# Altium PCB PCB.PcbDoc
Units mm, origin at the board's own origin, x right, y up, seen from the top; angles counter-clockwise.
Board outline 119 x 68 mm, 2 copper layers (Top Layer, Bottom Layer); 74 components, 65 nets, 213 pads, 2 vias.
Unrouted connection lines stored in the file: 1.
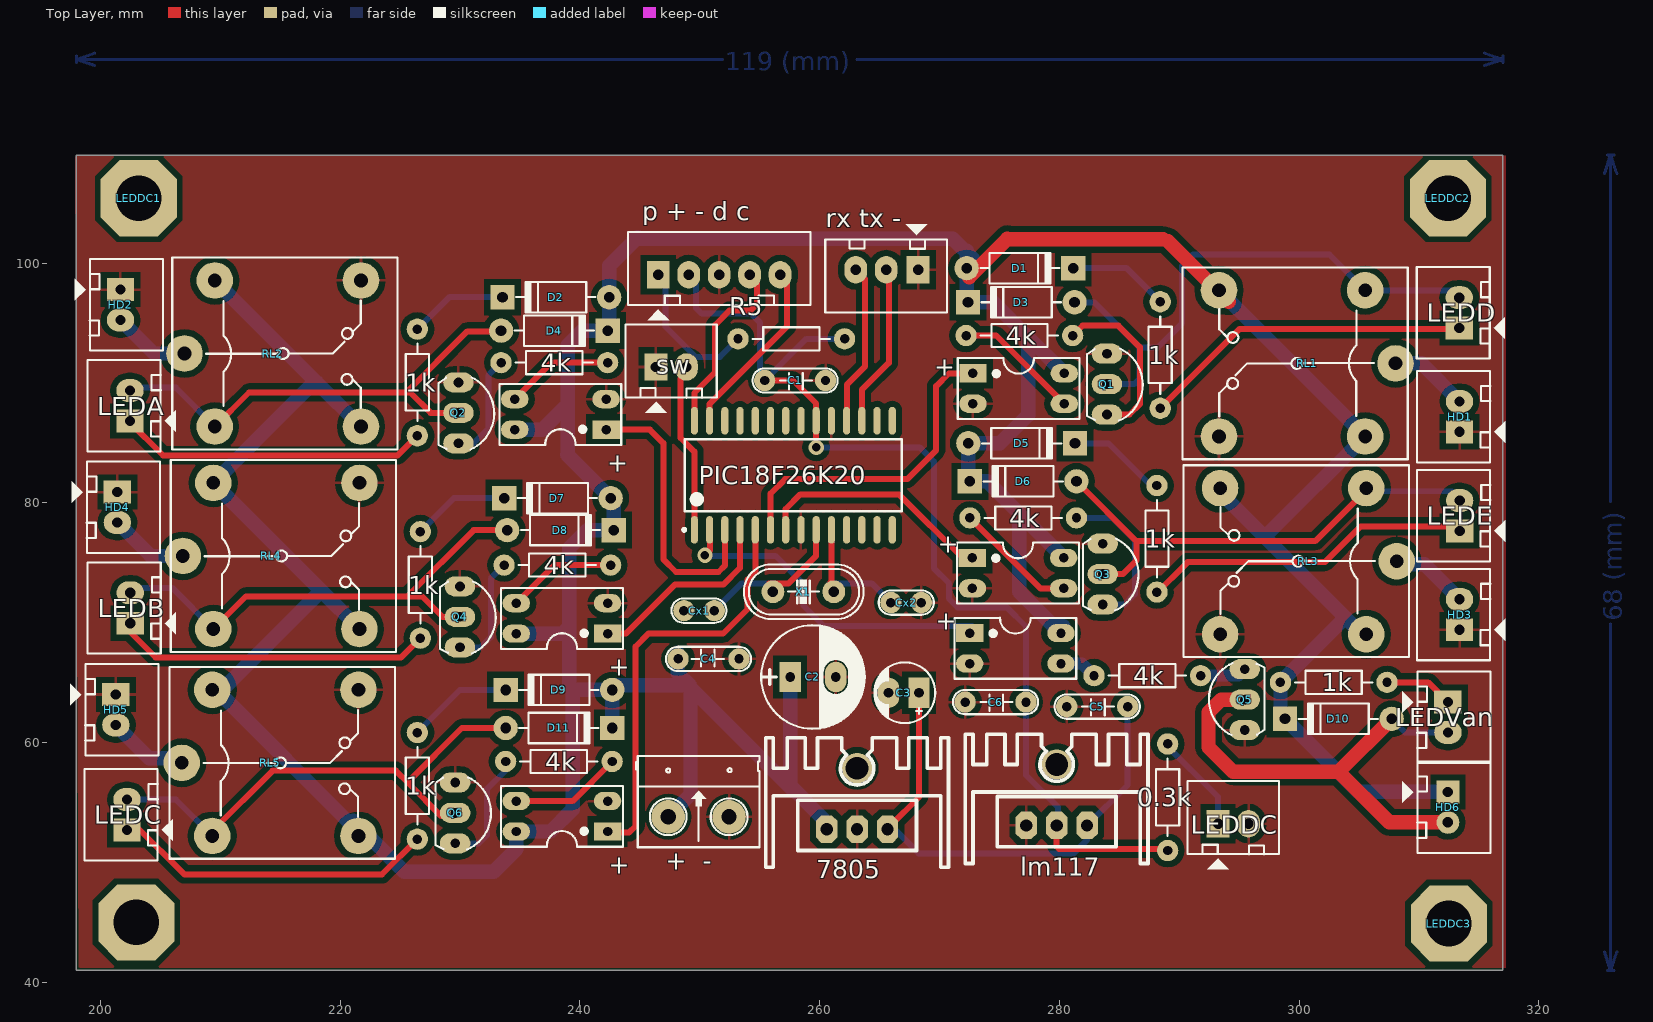
[diagram p0: Top Layer view]
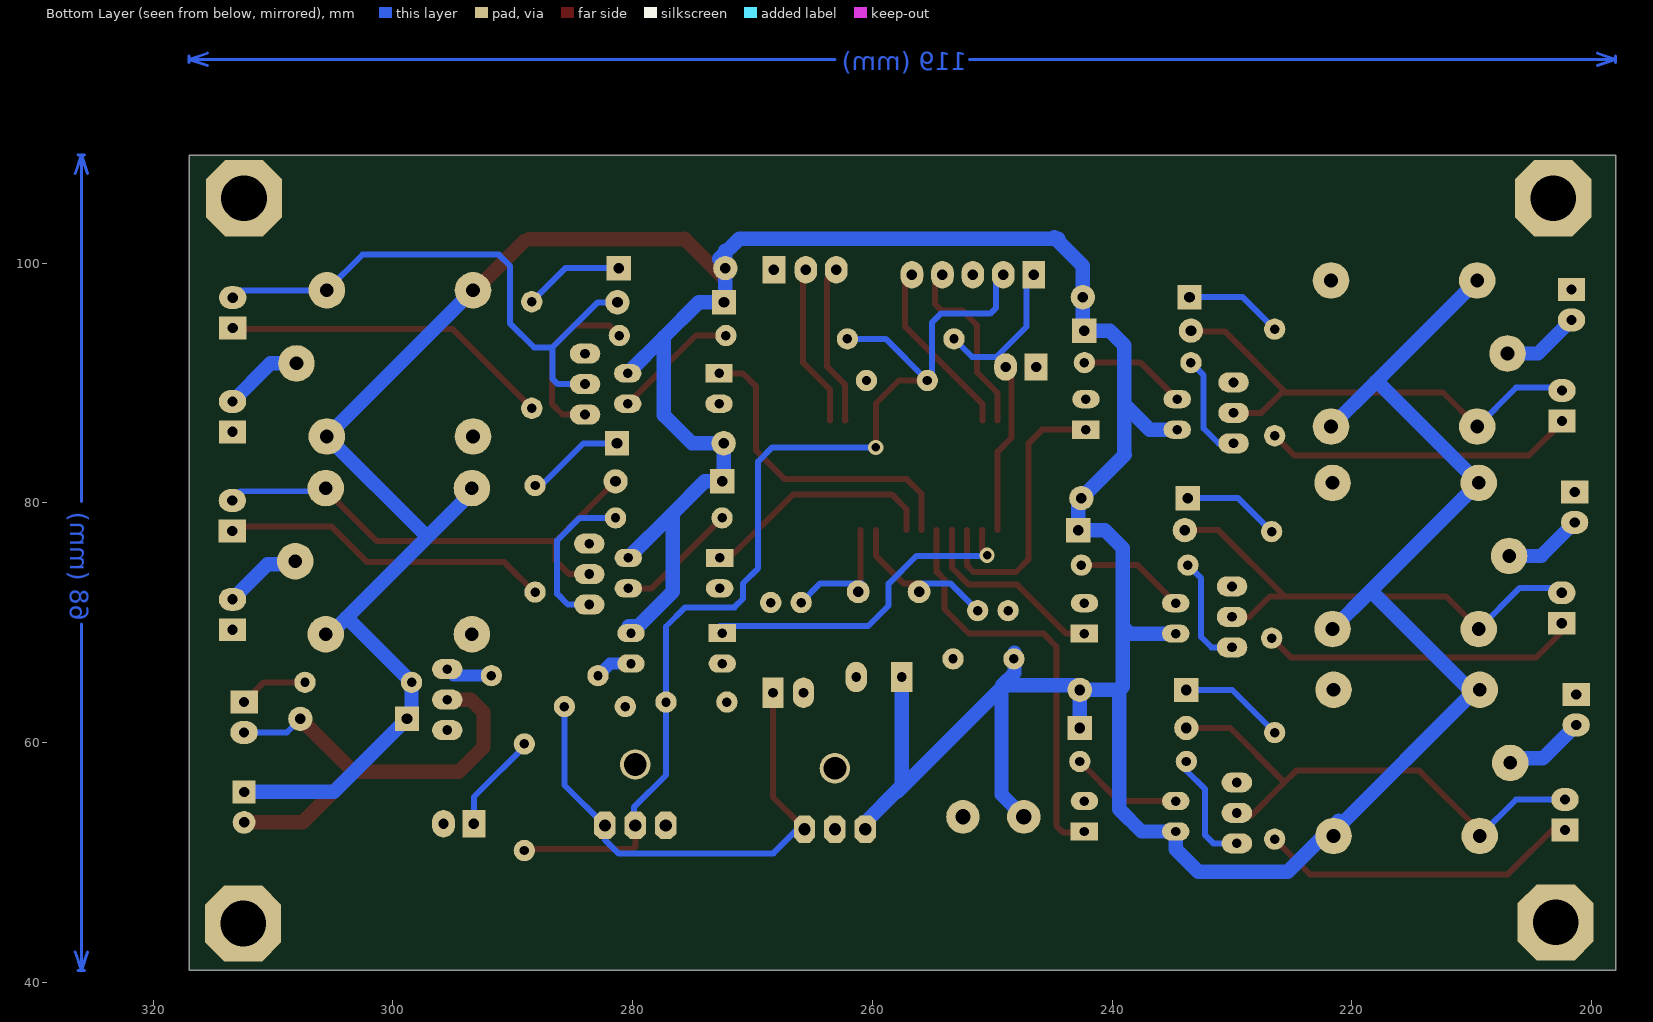
[diagram p1: Bottom Layer view, seen from below]
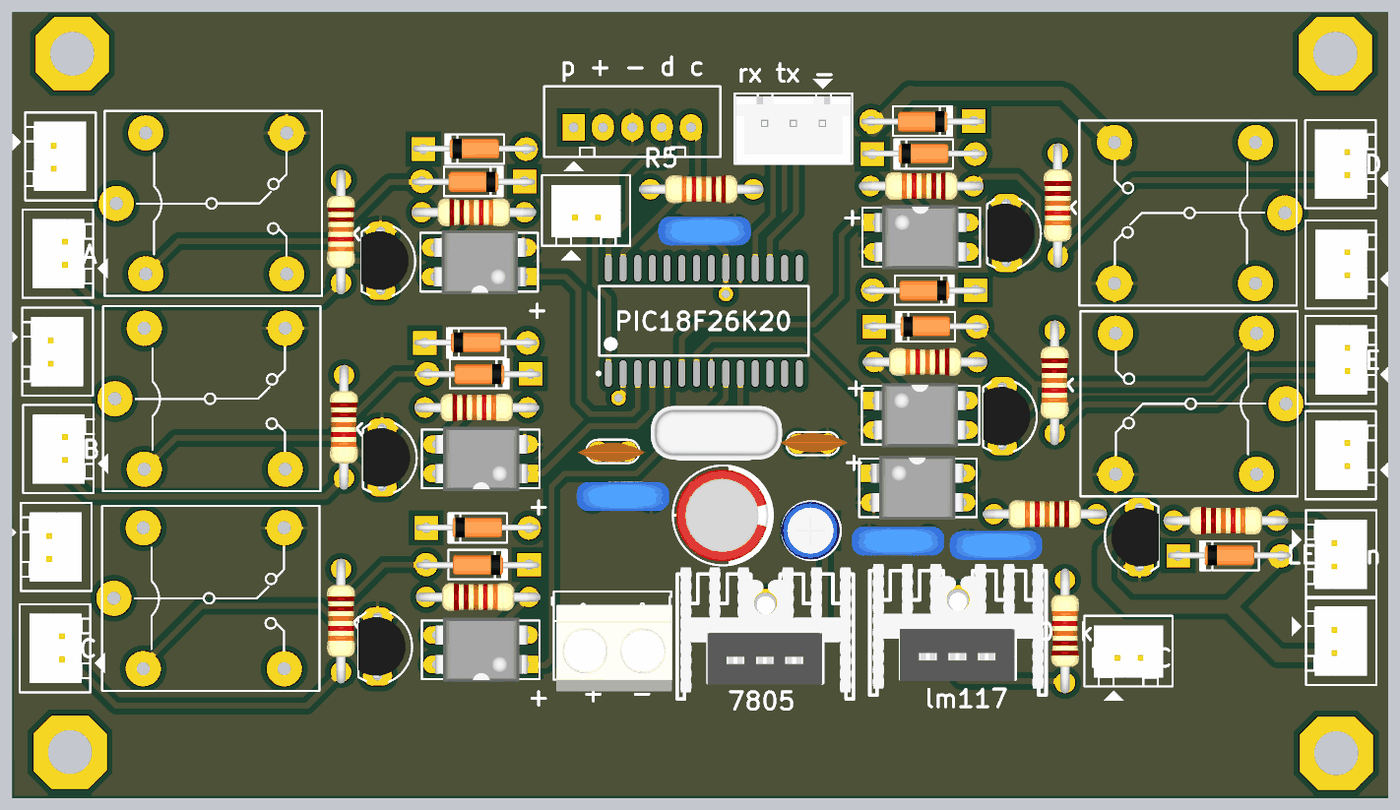
[diagram p2: 3D render of the assembled board from above, using the file's embedded part models]

## Layer stack, top to bottom
Top Layer: signal copper 0.0356
Dielectric: dielectric 0.32, FR-4, Dk 4.8
Bottom Layer: signal copper 0.0356

## Board outline
198,109 198,41 317,41 317,109 198,109

## Design rules (kind name [scope] priority, off if disabled: settings)
Clearance [All] p1: gap=0.5
PolygonConnect [All] p1: connectstyle=Relief reliefconductorwidth=0.254 reliefentries=4 polygonreliefangle="90 Angle"
RoutingVias [All] p1: holewidth=0.711 width=1.27 viastyle="Through Hole" minholewidth=0.711 minwidth=1.27 maxholewidth=0.711 maxwidth=1.27
SilkscreenOverComponentPads [All] p1: minsilkscreentomaskgap=0.254
SolderMaskExpansion [All] p1: expansion=0.102
Width 220V [(InNet('24') OR InNet('25') OR InNet('26') OR InNet('27') OR InNet('28') OR InNet('29') OR InNet('30') OR InNet('31') OR InNet('32'))] p1: maxlimit=2.388 minlimit=2.388 preferedwidth=2.388
Width power [(InNet('12V') OR InNet('NetHD1_2') OR InNet('NetHD2_2') OR InNet('NetHD3_2') OR InNet('NetHD4_2') OR InNet('NetHD5_2') OR InNet('33') OR InNet('34'))] p2: maxlimit=1.2 minlimit=1.2 preferedwidth=1.2
Width "all net" [All] p3: maxlimit=1.5 minlimit=0.5 preferedwidth=0.5
27 further rules are at their usual default settings.

## Components (designator, comment, footprint, x,y, rotation, side; value= is the part's Value field where it differs from the comment)
0.3k "1k" R1/4W 289.04,59.881 r270 top (schematic designator R14)
1k "1k" R1/4W 226.441,51.943 r90 top (schematic designator R13)
1k "1k" R1/4W 307.34,65.024 r180 top (schematic designator R12)
1k "1k" R1/4W 226.695,68.707 r90 top (schematic designator R9)
1k "1k" R1/4W 288.146,72.554 r90 top (schematic designator R8)
1k "1k" R1/4W 226.441,85.598 r90 top (schematic designator R4)
1k "1k" R1/4W 288.417,87.884 r90 top (schematic designator R3)
4k "4.7k" R1/4W 242.697,58.42 r180 top (schematic designator R11)
4k "4.7k" R1/4W 282.896,65.579 r0 top (schematic designator R10)
4k "4.7k" R1/4W 242.57,74.803 r180 top (schematic designator R7)
4k "4.7k" R1/4W 272.542,78.74 r0 top (schematic designator R6)
4k "4.7k" R1/4W 242.316,91.694 r180 top (schematic designator R2)
4k "4.7k" R1/4W 272.221,93.954 r0 top (schematic designator R1)
7805 "7805" QTO-220H3 260.592,52.769 r0 top (schematic designator J2)
+ "PC817" DIP4/W0.3 242.316,52.578 r90 top (schematic designator U7)
+ "PC817" DIP4/W0.3 272.521,69.129 r270 top (schematic designator U6)
+ "PC817" DIP4/W0.3 242.316,69.088 r90 top (schematic designator U5)
+ "PC817" DIP4/W0.3 272.746,75.404 r270 top (schematic designator U4)
+ "PC817" DIP4/W0.3 242.189,86.106 r90 top (schematic designator U2)
+ "PC817" DIP4/W0.3 272.796,90.804 r270 top (schematic designator U1)
"+  -" "Jac DC" HED2 247.371,53.804 r0 top (schematic designator JDC1)
C1 "104" CN2 260.496,90.204 r180 top
C2 "100uF/35V" CP1.5/3.4 257.544,65.469 r0 top
C3 "10uF" CP1/2 268.296,64.154 r180 top
C4 "104" CN2 248.196,66.979 r0 top
C5 "104" CN2 285.696,63.004 r180 top
C6 "104" CN2 277.221,63.379 r180 top
Cx1 "33pF" CN1 251.221,71.004 r180 top
Cx2 "33pF" CN1 265.946,71.679 r0 top
D1 "1N4007" D1A 272.271,99.579 r180 top
D2 "1N4007" D1A 242.443,97.155 r0 top
D3 "1N4007" D1A 281.271,96.729 r0 top
D4 "1N4007" D1A 233.426,94.361 r180 top
D5 "1N4007" D1A 272.415,84.963 r180 top
D6 "1N4007" D1A 281.432,81.788 r0 top
D7 "1N4007" D1A 242.57,80.391 r0 top
D8 "1N4007" D1A 233.934,77.724 r180 top
D9 "1N4007" D1A 242.697,64.389 r0 top
D10 "1N4007" D1A 307.721,61.976 r0 top
D11 "1N4007" D1A 233.807,61.214 r180 top
HD1 "Header 2" CON2#1 313.388,85.917 r90 top
HD2 "Header 2" CON2#1 201.676,97.79 r270 top
HD3 "Header 2" CON2#1 313.388,69.407 r90 top
HD4 "Header 2" CON2#1 201.422,80.899 r270 top
HD5 "Header 2" CON2#1 201.295,64.008 r270 top
HD6 "Header 2" CON2#2 312.42,55.88 r270 top
LEDA "LED" CON2#1 202.471,86.829 r90 top (schematic designator LED2)
LEDB "LED" CON2#1 202.496,69.954 r90 top (schematic designator LED4)
LEDC "LED" CON2#1 202.221,52.704 r90 top (schematic designator LED6)
LEDD "LED" CON2#1 313.371,94.579 r90 top (schematic designator LED1)
LEDDC "LED" CON2#1 293.246,53.229 r0 top (schematic designator LED7)
LEDDC1 "LED" VIT 203.2,105.41 r0 top (schematic designator LED7)
LEDDC2 "LED" VIT 312.42,105.41 r0 top (schematic designator LED7)
LEDDC3 "LED" VIT 312.5,44.9 r0 top (schematic designator LED7)
LEDE "LED" CON2#1 313.396,77.654 r90 top (schematic designator LED3)
LEDVan "LED" CON2#1 312.421,63.379 r270 top (schematic designator LED5)
lm117 "LM117" QTO-220H3 277.241,53.086 r0 top (schematic designator J3)
"p + - d c" "ICSD" CON5 246.546,99.029 r0 top (schematic designator *1)
PIC18F26K20 "PIC18F26K20-I/SO" SOIC-SO28_N 257.81,82.296 r90 top (schematic designator U3)
Q1 "C1815" QTO-92 283.971,89.904 r270 top
Q2 "C1815" QTO-92 229.87,87.503 r270 top
Q3 "C1815" QTO-92 283.621,74.054 r270 top
Q4 "C1815" QTO-92 229.997,70.485 r270 top
Q5 "C1815" QTO-92 295.471,63.579 r90 top
Q6 "C1815" QTO-92 229.596,54.129 r270 top
R5 "1k" R1/4W 253.196,93.679 r0 top
RL1 "Relay 10A/12V" RL_SPDT_10A 308.054,91.632 r180 top
RL2 "Relay 10A/12V" RL_SPDT_10A 207.01,92.456 r0 top
RL3 "Relay 10A/12V" RL_SPDT_10A 308.146,75.129 r180 top
RL4 "Relay 10A/12V" RL_SPDT_10A 206.883,75.565 r0 top
RL5 "Relay 10A/12V" RL_SPDT_10A 206.796,58.304 r0 top
"rx tx -" "UART" CON3 268.097,99.441 r180 top (schematic designator J1)
sw "SW" CON2#1 246.346,91.329 r0 top (schematic designator SW1)
X1 "4Mhz" XT2 258.646,72.581 r180 top

## Footprints (in the part's own frame and the unit in brackets; to place one, negate y for a bottom-side part, rotate by r counter-clockwise, add the part's x,y. Pads: shape width x height; smd on the part's side, far side on the other; paste and mask are expansions set on the pad)
CN1 [mil]
  round 70 hole 31: 1(0,0) 2(100,0)
  silkscreen extent -40,-40 141,40, body extent -60,-30 170,37, height 265
CN2 [mil]
  round 70 hole 31: 1(0,0) 2(200,0)
  silkscreen extent -40,-40 240,40, body extent -54,-44 260,55, height 407
CON2#1 [mil] "CON2"
  rect 75x90 hole 34: 1(0,0)
  oval 75x90 hole 34: 2(100,0)
  silkscreen extent -100,-150 200,140, body extent -68,-70 168,107, height 236
CON2#2 [mil] "CON2"
  rect 75x75 hole 34: 1(0,0)
  round 75 hole 34: 2(100,0)
  silkscreen extent -100,-150 200,140, body extent -68,-70 168,107, height 236
CON3 [mil] "CON 3"
  rect 75x90 hole 34: 1(-5,0)
  oval 75x90 hole 34: 2(100,0) 3(200,0)
  silkscreen extent -100,-150 300,140, body extent -95,-90 295,136, height 276
CON5 [mil] "CON5"
  rect 75x90 hole 34: 1(0,0)
  oval 75x90 hole 34: 2(100,0) 3(200,0) 4(300,0) 5(400,0)
  silkscreen extent -100,-150 500,140
CP1.5/3.4 [mil] "Tu hoa 220->470uF,16V, 470uF/16V,25V"
  rect 70x100 hole 32: 1(0,0)
  oval 70x100 hole 32: 2(150,0)
  silkscreen extent -95,-170 245,170, body extent -85,-157 230,157, height 446
CP1/2 [mil] "Tu hoa < 22uF/16>50V"
  rect 70x100 hole 32: 1(0,0)
  oval 70x100 hole 32: 2(100,0)
  silkscreen extent -53,-100 147,100, body extent -49,-99 149,99, height 287
D1A [mil] "Diode 1A, W 100mil, L 350mil"
  round 80 hole 35: 1(0,0)
  rect 80x80 hole 35: 2(-350,0)
  silkscreen extent -305,-50 -45,50, body extent -386,-33 34,36, height 84
DIP4/W0.3 [mil] "4 PIN, W 300mil, Pin to pin 100mil"
  rect 60x90 hole 31: 1(0,0)
  oval 60x90 hole 31: 2(100,0) 3(100,300) 4(0,300)
  silkscreen extent -50,-50 150,350, body extent -59,-10 159,305, height 170
HED2 [mil] "Header 2, 2 pin, hight 300mil, Pin to Pin 200, Colour Green"
  round 110 hole 50: 1(0,0) 2(200,0)
  silkscreen extent -106,-100 300,200, body extent -92,-140 302,155, height 394
QTO-92 [mil] "TO-92"
  oval 66x100 hole 32: 1(-100,0) 2(0,0) 3(100,0)
  silkscreen extent -117,-65 120,118, body extent -109,-66 109,95, height 245
QTO-220H3 [mil] "TO-220 1-2-3"
  oct 70x90 hole 40: 1(0,0) 2(100,0) 3(200,0)
  round 100 hole 75: 4(100,200)
  silkscreen extent -200,-125 400,300, body extent -190,-102 392,323, height 984
R1/4W [mil] "R 1/4W, 2 Pin, 350mil"
  round 70 hole 31: 1(0,0) 2(350,0)
  silkscreen extent 48,-38 302,38, body extent -40,-47 386,47, height 111
RL_SPDT_10A [mil] "Relay SPDT, 5 pin, 10A,W 650mil, L 800mil, H 800mil"
  round 120 hole 45: 1(0,0) 2(580,240) 3(580,-240) 4(100,-240) 5(100,240)
  silkscreen extent -40,-315 700,315
SOIC-SO28_N [mm] "SOIC, 28-Leads, Body 17.9x7.5mm, Pitch 1.27mm, IPC Medium Density"
  oval 2.3x0.6 smd: 1(-4.55,8.255) 2(-4.55,6.985) 3(-4.55,5.715) 4(-4.55,4.445) 5(-4.55,3.175) 6(-4.55,1.905) 7(-4.55,0.635) 8(-4.55,-0.635) 9(-4.55,-1.905) 10(-4.55,-3.175) 11(-4.55,-4.445) 12(-4.55,-5.715) 13(-4.55,-6.985) 14(-4.55,-8.255) 15(4.55,-8.255) 16(4.55,-6.985) 17(4.55,-5.715) 18(4.55,-4.445) 19(4.55,-3.175) 20(4.55,-1.905) 21(4.55,-0.635) 22(4.55,0.635) 23(4.55,1.905) 24(4.55,3.175) 25(4.55,4.445) 26(4.55,5.715) 27(4.55,6.985) 28(4.55,8.255)
  silkscreen extent -4.67,-9.05 3,9.23, body extent -3.8,-9.06 3.8,9.06, height 2.65
VIT [mm] "VIT"
  oct 6.35x6.35 hole 3.81: VIT1(0,0)
XT2 [mil] "Footpin for Crystal 2 pin"
  round 75 hole 34: 1(-100,0) 2(100,0)
  silkscreen extent -198,-90 195,90, body extent -233,-93 213,90, height 138

## Part data
0.3k 1k 1k 1k 1k 1k 1k 4k 4k 4k 4k 4k 4k R5: library part R1/4W, "Resistor 1/4W"
7805 lm117 "rx tx -": library part JP3, "Jumper 3"
+ + + + + +: "Single Opto"
"+  -": library part DCIN, "Jac DC input"
C1 C4 C5 C6: library part CN2, "Cap np 104 => 105pF"
C2: library part CP3, "Cap 100uF/35V - 470uF/16V"
C3: library part CP1, "Cap P  0,1uF < 22uF , 16 - 50V"
Cx1 Cx2: library part CN0, "Cremic For Xtal 1pF => 100pF"
D1 D2 D3 D4 D5 D6 D7 D8 D9 D10 D11: library part D1A, "Diode 1A"
HD1 HD2 HD3 HD4 HD5 HD6: library part Hed2, "Header 2 (Green)"
LEDA LEDB LEDC LEDD LEDDC LEDDC1 LEDDC2 LEDDC3 LEDE LEDVan: "LED Single colour Green and Red"
"p + - d c": library part JP5
PIC18F26K20: "Flash Microcontroller with 10-Bit A/D and nanoWatt Technology, 64K Flash, 28-Pin SOIC, Industrial Temperature Range"
Q1 Q2 Q3 Q4 Q5 Q6: "NPN 600mW, ECB"
RL1 RL2 RL3 RL4 RL5: library part "Relay 1", "Relay SPDT,10A - 12VDC 5 Pin"
sw: library part SW2, "Switch button 2 pin"
X1: library part XT2, "Crystal For all Crystal 2pin."

## Free pads (board coordinates)
  oct 6.35x6.35 hole 3.8: VIT4(203,45)

## Via types
v1: diameter 1.27, hole 0.711, Top Layer to Bottom Layer, 2 vias

## Nets (pads, with @x,y where several pads share a name; then routed paths per layer and width w, separated by ;. In a path a pad name is that pad's centre, name@x,y a point inside that pad or via, vN(x,y) a via of type N, cw(c..) or ccw(c..) an arc to the next point about the centre after c; other vN are vias at no path point)
3.3V: 0.3k.2 "p + - d c.2" C1.2 C6.1 lm117.2 PIC18F26K20.20 R5.2 | length 87.8
  Top Layer w0.5: C1.2 257.796,90.204 259.715,88.285 PIC18F26K20.20 v1(259.715,84.623) ; lm117.2 279.781,51.344 279.986,51.139 0.3k.2@288.671,51.139
  Bottom Layer w0.5: 249.682,98.298 249.682,96.268 250.171,95.779 254.296,95.779 255.046,95.029 255.046,90.574 C1.2 258.891,93.679 R5.2 ; v1(259.715,84.623) 268.346,84.623 269.527,83.442 269.527,74.548 270.796,73.279 270.796,72.004 271.521,71.279 275.621,71.279 277.221,69.679 C6.1 277.221,57.279 279.871,54.629 279.871,53.176 lm117.2
12V: 1k.2@298.45,65.024 7805.1 "+  -.1" +.4 C2.1 C4.1 D1.1 D2.1 D3.2 D4.2 D5.1 D6.2 D7.1 D8.2 D9.1 D10.2 D11.2 HD6.1 RL1.3 RL1.5 RL2.3 RL2.5 RL3.3 RL3.5 RL4.3 RL4.5 RL5.3 RL5.5 | length 400.1
  Top Layer w1.2: D1.1@272.471,98.829 275.671,102.029 ; 275.846,101.979 288.646,101.979 ; 289.071,101.829 RL1.3@294.122,96.778
  Bottom Layer w1.2: RL4.5@208.566,81.754 RL4.5@209.516,81.754 ; RL5.5 RL5.5@209.666,64.4 ; RL2.5 218.06,90.042 ; RL5.3@221.097,53.478 225.346,49.229 ; RL5.3@221.488,52.578 RL5.5@209.666,64.4 ; RL4.3 218.43,72.654 ; RL2.3 218.06,90.042 ; 225.587,49.229 232.821,49.229 234.696,51.104 234.696,52.578 237.545,52.578 239.395,54.428 239.395,64.389 ; +.4@234.569,86.106 236.855,86.106 238.996,88.247 ; +.4@234.696,69.088 238.53,69.088 239.121,69.679 ; D11.2 D9.1 ; 244.496,102.029 270.796,102.029 ; 244.834,102.167 242.443,99.776 D2.1 242.443,94.488 D4.2 240.203,94.361 238.996,93.154 238.996,88.247 ; 247.371,53.804 249.23,55.663 249.23,64.563 257.863,55.93 ; C4.1@248.146,67.479 248.146,65.798 249.174,64.77 243.078,64.77 D9.1 ; C2.1@257.544,65.579 257.544,56.4 7805.1@260.858,53.086 ; 271.121,102.029 D1.1@272.796,100.354 ; 272.271,101.029 D1.1 272.271,96.839 D3.2 274.491,96.729 277.393,93.827 ; +.4@280.316,69.704 279.546,69.704 276.666,72.584 276.666,79.104 ; +.4@280.366,75.404 276.666,79.104 ; +.4@280.416,90.804 277.393,93.827 ; RL3.3@293.322,80.964 297.246,77.04 ; RL1.3 RL1.5 297.246,77.268 297.246,77.04 ; RL3.5@305.514,68.772 303.882,70.404 ; HD6.1 304.927,55.88 D10.2 298.45,62.357 298.45,65.024 303.83,70.404 303.882,70.404 ; RL4.5@209.516,81.754 217.804,90.042 218.06,90.042 ; RL4.5@209.516,81.754 RL4.5 218.43,72.654 ; RL5.5@209.666,64.4 210.176,64.4 RL5.5@210.546,64.77 ; RL5.5@209.666,64.4 209.296,64.77 RL5.5@210.546,64.77 ; RL5.5@210.546,64.77 218.43,72.654 ; 238.996,88.247 238.996,84.043 238.957,84.004 D7.1 242.824,80.137 D8.2 240.616,77.724 239.121,76.229 239.121,69.679 ; 239.121,69.679 239.121,64.663 239.395,64.389 ; 239.395,64.389 D9.1 ; 276.666,79.104 273.982,81.788 D6.2 272.415,81.915 D5.1 275.055,84.963 277.393,87.301 277.393,93.827 ; 297.246,77.04 303.882,70.404
24: 
25: 
26: 
27: 
28: 
29: 
30: 
31: 
32: 
33: 
34: 
35: 
36: 
GND: 7805.2 "+  -.2" "p + - d c.3" "rx tx -.1" +.2 C1.1 C2.2 C3.2 C4.2 C5.2 C6.2 Cx1.2 Cx2.2 HD1.1 HD2.1 HD3.1 HD4.1 HD5.1 LEDDC.2 lm117.1 PIC18F26K20.8 PIC18F26K20.19 Q1.1 Q2.1 Q3.1 Q4.1 Q5.1 Q6.1 RL1.2 RL2.2 RL3.2 RL4.2 RL5.2 sw.1
MOTO: +.1@272.521,69.129 PIC18F26K20.2 | length 27.1
  Top Layer w0.5: PIC18F26K20.2 250.846,77.725 v1@250.846,76.004
  Bottom Layer w0.5: v1@250.846,75.579 256.321,75.579 258.646,73.254 258.646,71.429 260.371,69.704 +.1@272.696,69.704
  other v1: 250.432,75.629
NetC3_1: 7805.3 C3.1 C5.1 lm117.3 | length 42.4
  Top Layer w0.5: 7805.3@265.938,53.086 268.296,55.444 C3.1
  Bottom Layer w0.5: 7805.3@265.938,53.086 268.27,50.754 281.196,50.754 282.321,51.879 lm117.3 285.696,56.461 C5.1
NetD1_2: 1k.2@288.417,96.774 D1.2 | length 8.4
  Bottom Layer w0.5: D1.2 285.612,99.579 1k.2@288.417,96.774
NetD2_2: 1k.2@226.441,94.488 D2.2 | length 8.2
  Bottom Layer w0.5: 1k.2@226.441,94.488 229.108,97.155 D2.2
NetD5_2: 1k.2@288.146,81.444 D5.2 | length 8.2
  Bottom Layer w0.5: D5.2 284.099,84.963 1k.2@287.909,81.153
NetD7_2: 1k.2@226.695,77.597 D7.2 | length 8.1
  Bottom Layer w0.5: 1k.2@226.695,77.597 229.489,80.391 D7.2
NetD9_2: 1k.2@226.441,60.833 D9.2 | length 8.8
  Bottom Layer w0.5: 1k.2@226.441,60.833 229.997,64.389 D9.2
NetHD1_2: HD1.2 RL1.1 | length 6.6
  Bottom Layer w1.2: RL1.1 310.213,91.632 HD1.2
NetHD2_2: HD2.2 RL2.1 | length 6.5
  Bottom Layer w1.2: HD2.2 204.47,92.456 RL2.1
NetHD3_2: HD3.2 RL3.1 | length 6.5
  Bottom Layer w1.2: RL3.1@308.054,74.868 310.467,74.868 HD3.2
NetHD4_2: HD4.2 RL4.1 | length 6.6
  Bottom Layer w1.2: HD4.2 204.216,75.565 RL4.1
NetHD5_2: HD5.2 RL5.1 | length 6.6
  Bottom Layer w1.2: HD5.2 204.089,58.674 RL5.1@206.756,58.674
NetLED1_1: 1k.1@288.417,87.884 LEDD.1 | length 27.4
  Top Layer w0.5: 1k.1@288.417,87.884 295.015,94.482 LEDD.1@313.121,94.482
NetLED2_1: 1k.1@226.441,85.598 LEDA.1 | length 25.9
  Top Layer w0.5: LEDA.1@202.371,86.807 205.224,83.954 224.797,83.954 1k.1@226.441,85.598
NetLED3_1: 1k.1@288.146,72.554 LEDE.1 | length 27.4
  Top Layer w0.5: 1k.1@287.909,72.263 290.7,75.054 302.146,75.054 305.135,78.043 LEDE.1@312.88,78.043
NetLED4_1: 1k.1@226.695,68.707 LEDB.1 | length 26.9
  Top Layer w0.5: LEDB.1@201.93,70.104 201.93,69.77 204.596,67.104 225.092,67.104 1k.1@226.695,68.707
NetLED5_1: 1k.1@307.34,65.024 LEDVan.1 | length 5.8
  Top Layer w0.5: 1k.1@307.34,65.024 310.776,65.024 LEDVan.1
NetLED6_1: 1k.1@226.441,51.943 LEDC.1 | length 26.3
  Top Layer w0.5: LEDC.1@203,53 207,49 223.498,49 1k.1@226.441,51.943
NetLED7_1: 0.3k.1 LEDDC.1 | length 8.7
  Bottom Layer w0.5: 0.3k.1@288.671,60.029 293.246,55.454 LEDDC.1
NetQ1_3: 4k.2@281.111,93.954 Q1.3 | length 14.6
  Top Layer w0.5: 4k.2@281.111,93.954 281.936,94.779 284.921,94.779 286.721,92.979 286.721,88.229 285.856,87.364 Q1.3
NetQ2_3: 4k.2@233.426,91.694 Q2.3 | length 8.9
  Bottom Layer w0.5: Q2.3 231.13,84.963 232.371,86.204 232.371,90.639 4k.2@233.426,91.694
NetQ3_3: 4k.2@281.432,78.74 Q3.3 | length 13.1
  Bottom Layer w0.5: 4k.2@281.432,78.74 284.41,78.74 286.296,76.854 286.296,72.404 285.406,71.514 Q3.3
NetQ4_3: 4k.2@233.68,74.803 Q4.3 | length 9.4
  Bottom Layer w0.5: Q4.3 231.712,67.945 232.571,68.804 232.571,73.694 4k.2@233.68,74.803
NetQ5_3: 4k.2@291.786,65.579 Q5.3 | length 3.9
  Bottom Layer w1: 4k.2@291.786,65.579 294.931,65.579 Q5.3
NetQ6_3: 4k.2@233.807,58.42 Q6.3 | length 9.7
  Bottom Layer w0.5: Q6.3 231.556,51.589 232.271,52.304 232.271,56.129 233.807,57.665 4k.2@233.807,58.42
NetR1_1: 4k.1@272.221,93.954 +.3@280.416,88.264 | length 10.6
  Top Layer w0.5: 4k.1@272.221,93.954 274.726,93.954 +.3@280.416,88.264
NetR2_1: 4k.1@242.316,91.694 +.3@234.569,88.646 | length 9
  Top Layer w0.5: +.3@234.569,88.646 237.617,91.694 4k.1@242.316,91.694
NetR6_1: 4k.1@272.542,78.74 +.3@280.366,72.864 | length 10.3
  Top Layer w0.5: 4k.1@272.542,78.74 278.418,72.864 +.3@280.366,72.864
NetR7_1: 4k.1@242.57,74.803 +.3@234.696,71.628 | length 9.2
  Top Layer w0.5: +.3@234.696,71.628 237.871,74.803 4k.1@242.57,74.803
NetR10_1: 4k.1@282.896,65.579 +.3@280.141,66.589 | length 3.2
  Bottom Layer w1: +.3@280.141,66.589 281.886,66.589 4k.1@282.896,65.579
NetR11_1: 4k.1@242.697,58.42 +.3@234.696,55.118 | length 9.4
  Top Layer w0.5: +.3@234.696,55.118 239.395,55.118 4k.1@242.697,58.42
OSC1: Cx1.1 PIC18F26K20.9 X1.2 | length 12.6
  Top Layer w0.5: X1.2@255.778,73.279 257.421,73.279 259.715,75.573 PIC18F26K20.9
  Bottom Layer w0.5: Cx1.1 253.496,73.279 X1.2@255.778,73.279
OSC2: Cx2.1 PIC18F26K20.10 X1.1 | length 10.3
  Top Layer w0.5: X1.1@260.858,73.279 260.985,73.406 PIC18F26K20.10
  Bottom Layer w0.5: X1.1@260.858,73.279 264.346,73.279 Cx2.1
PGC: "p + - d c.5" PIC18F26K20.27 | length 14.1
  Top Layer w0.5: PIC18F26K20.27 250.825,88.258 257.302,94.735 257.302,98.298
PGD: "p + - d c.4" PIC18F26K20.28 | length 14.6
  Top Layer w0.5: PIC18F26K20.28 249.555,89.163 251.271,90.879 251.271,94.829 252.471,96.029 254.221,96.029 254.762,96.57 254.762,98.298
QA: D4.1 LEDA.2 Q2.2 RL2.4 | length 40.8
  Top Layer w0.5: RL2.4 212.394,89.204 225.521,89.204 ; Q2.2 227.547,87.503 225.846,89.204 225.521,89.204 ; D4.1 233.369,94.304 230.621,94.304 225.521,89.204
  Bottom Layer w0.5: LEDA.2@202.371,89.601 206.309,89.601 RL2.4
QB: D8.1 LEDB.2 Q4.2 RL4.4 | length 41.9
  Top Layer w0.5: RL4.4 212.133,72.179 225.596,72.179 ; Q4.2 228.54,70.485 226.846,72.179 225.596,72.179 ; D8.1 231.141,77.724 225.596,72.179
  Bottom Layer w0.5: LEDB.2@201.93,72.898 205.994,72.898 RL4.4
QC: D11.1 LEDC.2 Q6.2 RL5.4 | length 43.1
  Top Layer w0.5: RL5.4@209.296,52.578 214.372,57.654 224.646,57.654 225.721,56.579 ; Q6.2@230.124,53.975 228.567,53.975 228.446,53.854 225.721,56.579 ; D11.1 230.156,61.214 225.721,56.779 225.721,56.579
  Bottom Layer w0.5: LEDC.2 206.3,55.244 RL5.4
QD: D3.1 LEDD.2 Q1.2 RL1.4 | length 46.4
  Bottom Layer w0.5: D3.1 282.921,96.729 286.696,92.954 ; Q1.2 286.246,89.904 286.696,90.354 286.696,92.954 ; LEDD.2@313.121,97.276 312.669,97.728 RL1.4 302.538,100.704 291.171,100.704 290.221,99.754 290.221,94.954 288.221,92.954 286.696,92.954
QE: D6.1 LEDE.2 Q3.2 RL3.4 | length 40.2
  Top Layer w0.5: D6.1 286.421,76.799 ; Q3.2 285.296,74.054 286.421,75.179 286.421,76.799 ; RL3.4@305.514,80.964 301.349,76.799 286.421,76.799
  Bottom Layer w0.5: RL3.4@305.514,80.964 312.753,80.964 LEDE.2@312.88,80.837
QM: D10.1 HD6.2 LEDVan.2 Q5.2 | length 40.4
  Top Layer w1.2: Q5.2 293.496,63.579 292.446,62.529 292.446,59.604 294.496,57.554 303.299,57.554 ; D10.1 303.299,57.554 ; HD6.2 307.513,53.34 303.299,57.554
  Bottom Layer w0.5: D10.1 308.858,60.839 LEDVan.2
RX: "rx tx -.3" PIC18F26K20.18 | length 13.6
  Top Layer w0.5: PIC18F26K20.18 262.271,86.862 262.271,89.854 263.796,91.379 263.796,98.662 263.017,99.441
TX: "rx tx -.2" PIC18F26K20.17 | length 13.6
  Top Layer w0.5: PIC18F26K20.17 263.525,89.433 265.771,91.679 265.771,99.227 265.557,99.441
VANA: +.1@242.189,86.106 PIC18F26K20.3 | length 23.7
  Top Layer w0.5: +.1@242.189,86.106 245.844,86.106 246.971,84.979 246.971,75.279 248.021,74.229 251.572,74.229 252.095,74.752 PIC18F26K20.3
VANB: +.1@242.316,69.088 PIC18F26K20.4 | length 16.5
  Top Layer w0.5: +.1@242.316,69.088 243.83,69.088 247.921,73.179 251.971,73.179 253.365,74.573 PIC18F26K20.4
VANC: +.1@242.316,52.578 PIC18F26K20.5 | length 35.1
  Top Layer w0.5: +.1@242.316,52.578 242.39,52.504 244.121,52.504 244.646,53.029 244.646,68.004 245.721,69.079 251.946,69.079 253.988,71.121 253.988,73.597 254.635,74.244 PIC18F26K20.5
VAND: +.1@272.796,90.804 PIC18F26K20.6 | length 27.2
  Top Layer w0.5: PIC18F26K20.6 255.905,80.763 257.121,81.979 267.321,81.979 269.721,84.379 269.721,89.729 270.796,90.804 +.1@272.796,90.804
VANE: +.1@272.746,75.404 PIC18F26K20.7 | length 20
  Top Layer w0.5: PIC18F26K20.7 257.175,79.483 258.401,80.709 266.616,80.709 271.921,75.404 +.1@272.746,75.404
VPP: "p + - d c.1" PIC18F26K20.1 R5.1 sw.2 | length 25.6
  Top Layer w0.5: sw.2 248.886,90.847 248.4,90.361 248.4,85.425 249.555,84.27 PIC18F26K20.1
  Bottom Layer w0.5: 247.142,98.298 247.142,94.688 249.651,92.179 251.696,92.179 R5.1
pads on no net: 7805.4 LEDDC1.VIT1 LEDDC2.VIT1 LEDDC3.VIT1 lm117.4 PIC18F26K20.11 PIC18F26K20.12 PIC18F26K20.13 PIC18F26K20.14 PIC18F26K20.15 PIC18F26K20.16 PIC18F26K20.21 PIC18F26K20.22 PIC18F26K20.23 PIC18F26K20.24 PIC18F26K20.25 PIC18F26K20.26
copper on no net: | length 180.5
  Bottom Layer w0.254: 198,116.746 198,117.254 ; 199.524,116.492 198,117 ; 199.524,117.508 198,117 ; 251.888,117 198,117 ; 263.112,117 317,117 ; 315.476,116.492 317,117 ; 315.476,117.508 317,117 ; 317,116.746 317,117.254 ; 325.492,42.524 326,41 ; 325.492,107.476 326,109 ; 325.746,41 326.254,41 ; 325.746,109 326.254,109 ; 326,69.896 326,41 ; 326,80.104 326,109 ; 326.508,42.524 326,41 ; 326.508,107.476 326,109

## Polygon pours and split planes (outlines as drawn)
GND on Top Layer "Top Layer-No Net" (solid, pour order 6): 197.9,108.95 317.25,108.95 317.375,109.075 317.25,108.95 317.25,41.225 198.3,41.225 198.025,40.95 198.175,41.1 198.175,41.35

## Other copper
Bottom Layer:
  text "119 (mm)" at 252.142,116.086 h1.52
  text "68 (mm)" at 326.914,70.15 h1.52 r90